# Altium PCB Controller.PcbDoc (part 2 of 2)
Units mm, origin at the board's own origin, x right, y up, seen from the top; angles counter-clockwise.
Board outline 100 x 95 mm, 2 copper layers (Top Layer, Bottom Layer); 164 components, 143 nets, 702 pads, 925 vias.
Unrouted connection lines stored in the file: 248.
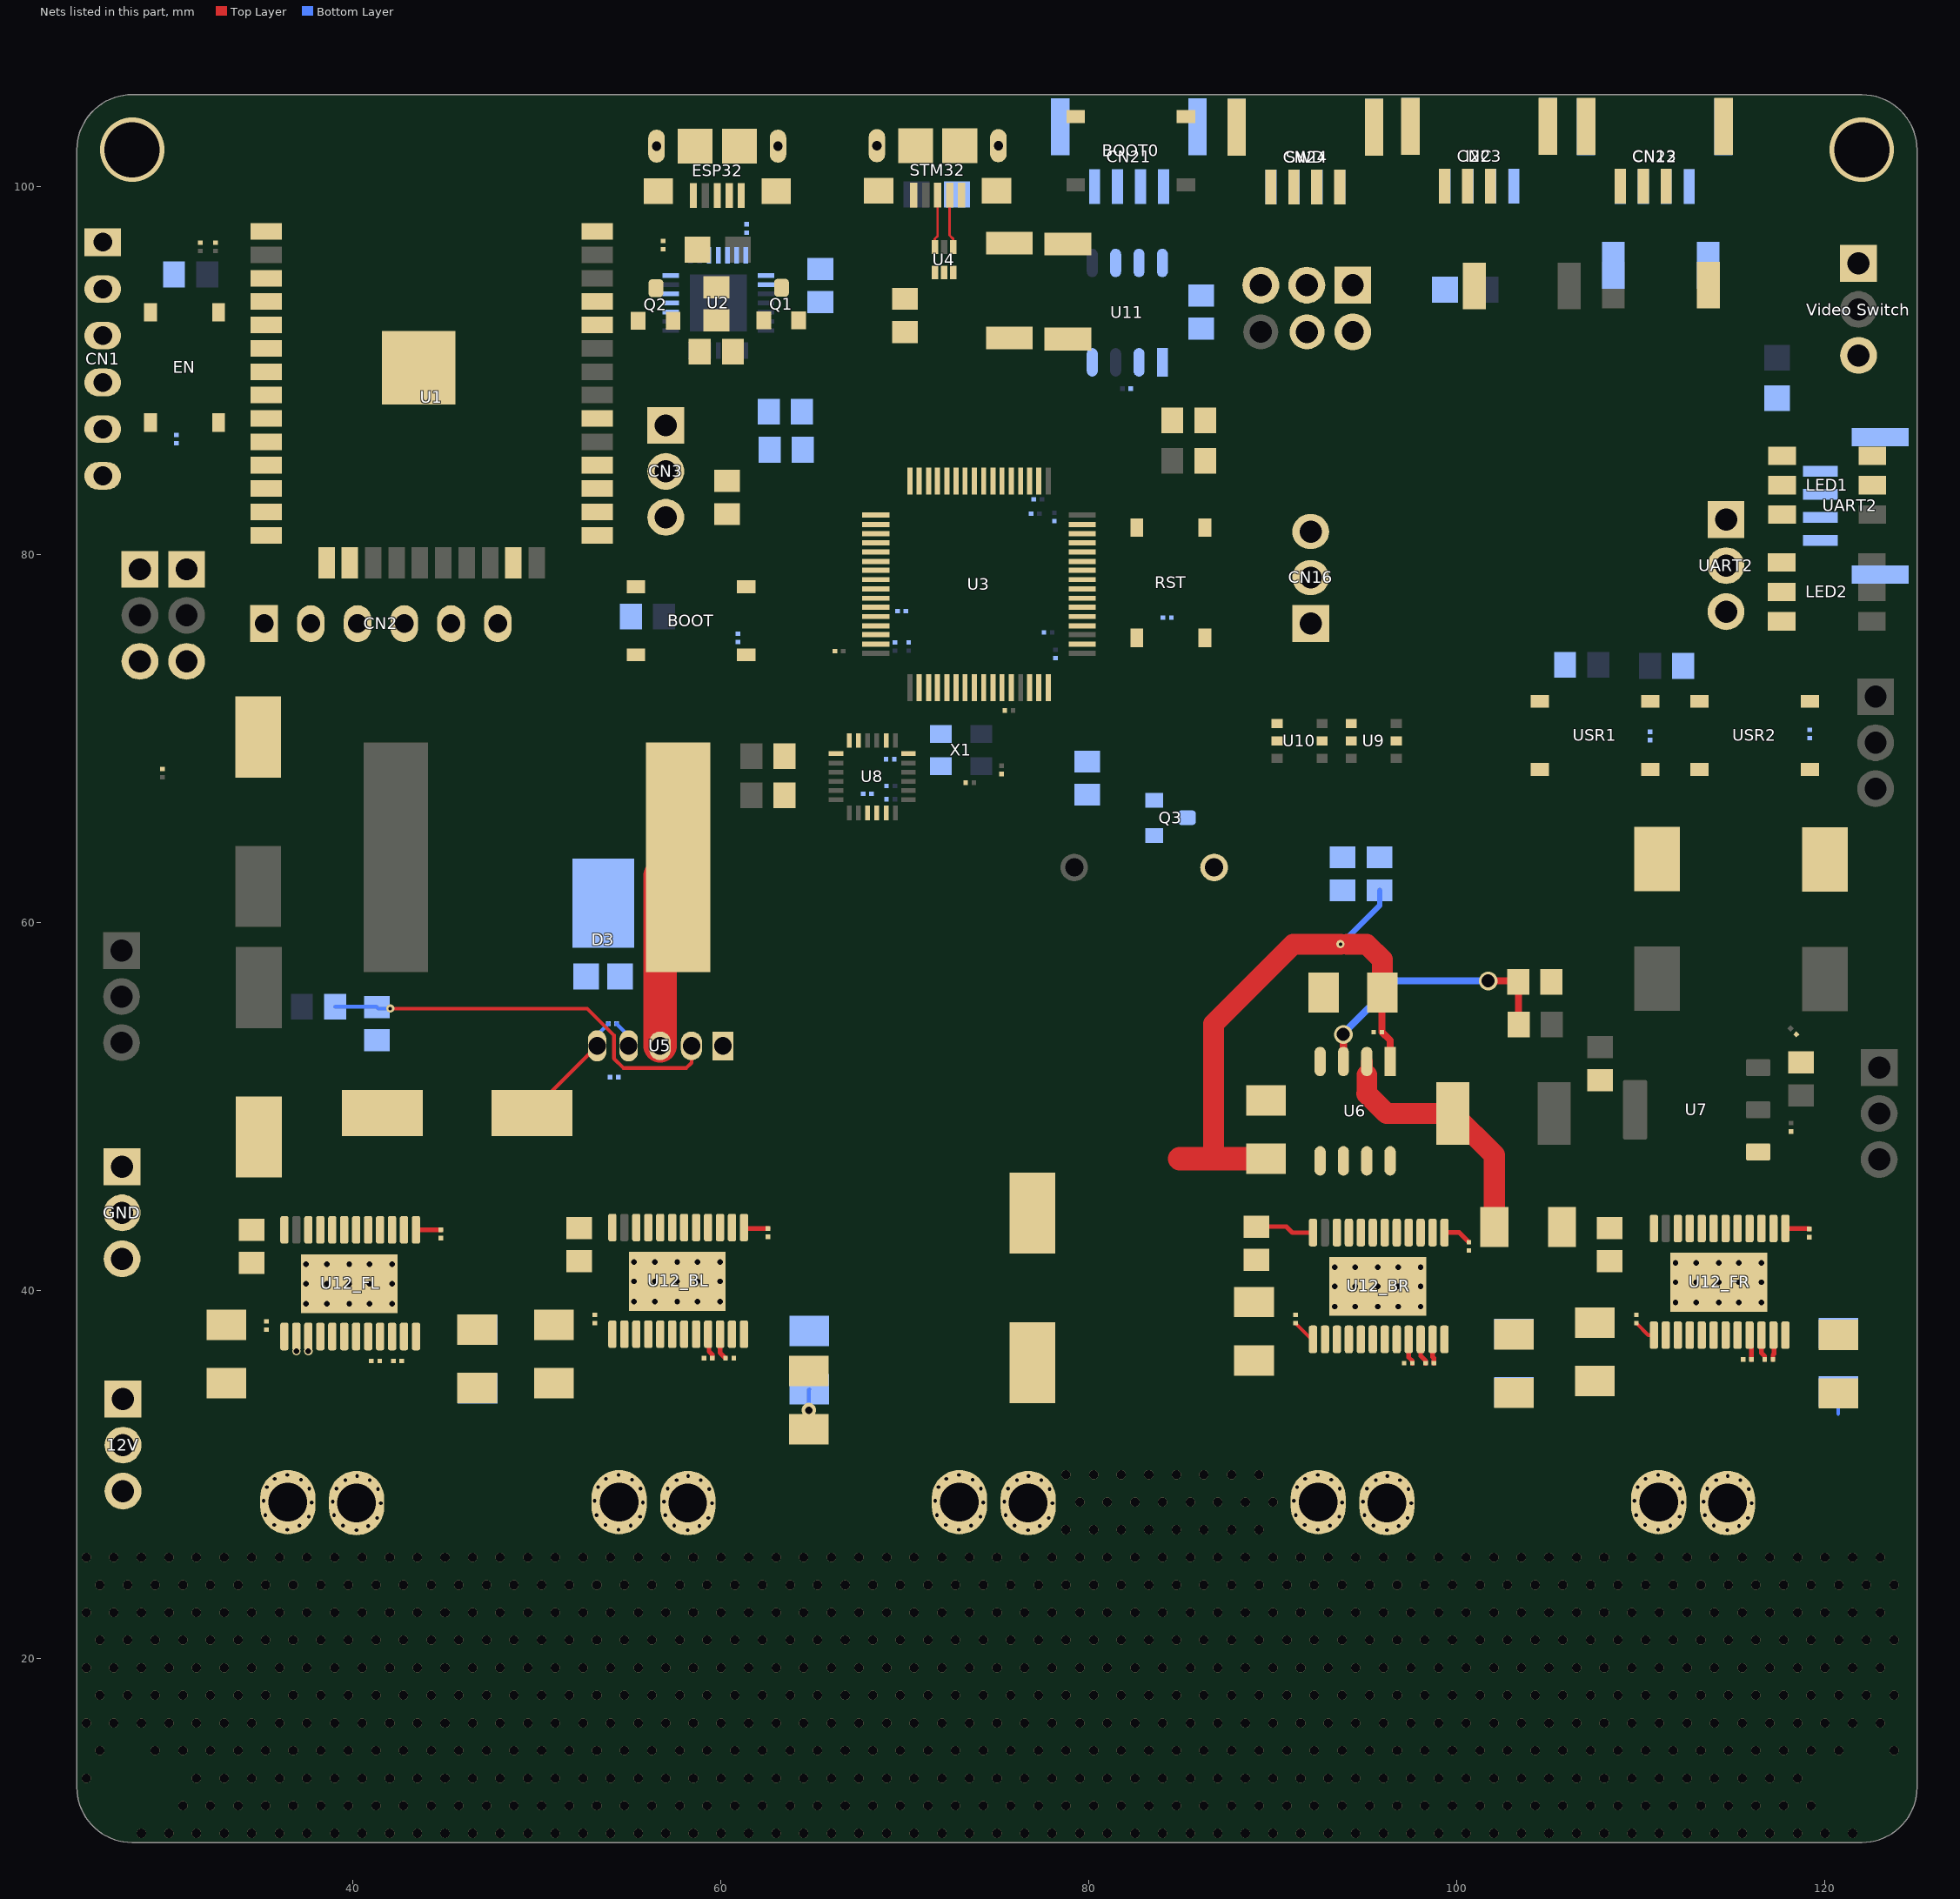
[diagram p2: the nets of this part, all layers, seen from the top]

## Via types
v1: diameter 0.45/0.45 (per signal layer), hole 0.5, Top Layer to Bottom Layer, tented both sides, 733 vias
v2: diameter 0.276, hole 0.2, Top Layer to Bottom Layer, tented both sides, 120 vias
v3: diameter 0.457, hole 0.3, Top Layer to Bottom Layer, tented both sides, 60 vias
v4: diameter 3.5, hole 3, Top Layer to Bottom Layer, 4 vias
v5: diameter 0.45, hole 0.2, Top Layer to Bottom Layer, tented both sides, 3 vias
v6: diameter 0.457, hole 0.305, Top Layer to Bottom Layer, tented both sides, 2 vias
v7: diameter 1.016, hole 0.711, Top Layer to Bottom Layer, tented both sides, 2 vias
v8: diameter 0.8, hole 0.4, Top Layer to Bottom Layer, tented both sides, 1 vias

## Nets (pads, with @x,y where several pads share a name; then routed paths per layer and width w, separated by ;. In a path a pad name is that pad's centre, name@x,y a point inside that pad or via, vN(x,y) a via of type N, cw(c..) or ccw(c..) an arc to the next point about the centre after c; other vN are vias at no path point) (continued)
12V: 12V.1 12V.2 12V.3 "3S INPUT.A" C22.2 C23.2 C24.1 C25.2 C26.2 C27.2 C37.1 C44.2 C46.2 C47.2 C48.2 C49.2 R22.2 U5.5 U6.1 U12_BL.13 U12_BL.20 U12_BR.13 U12_BR.20 U12_FL.13 U12_FL.20 U12_FR.13 U12_FR.20 | length 46.3
  Top Layer w0.2: C49.2@88.975,36.2 C49.2@89.2,36.2 ; C46.2@91.225,38.225 92.1,37.35 U12_BR.13@92.175,37.35 ; C46.2@109.75,38.225 110.4,37.575 U12_FR.13@110.7,37.575
  Top Layer w0.203: C24.1@49.728,49.65 49.728,49.758 U5.5@53.27,53.3 ; C47.2@64.775,32.463 v8(64.775,33.5)
  Top Layer w0.3: v5(93.675,58.825) 94.025,58.825
  Top Layer w0.381: C25.2@88.775,47.162 C25.2@89.625,47.162 ; C26.2@95.937,56.2 95.925,56.188 C27.2@95.925,54.05 96.37,53.605 U6.1@96.37,52.45
  Top Layer w1.143: 86.775,47.162 86.775,54.5 91.1,58.825 v5(93.675,58.825) ; 94.025,58.825 95.1,58.825 95.937,57.988 C26.2@95.937,56.2
  Top Layer w1.27: 84.931,47.162 86.775,47.162 C25.2@88.775,47.162
  Bottom Layer w0.2: 120.725,33.3 C48.2@120.725,34.512
  Bottom Layer w0.203: U5.5@53.27,52.63 U5.5@53.27,53.3 53.27,53.895 C22.2@53.875,54.5 ; v8(64.775,33.5) 64.775,34.613 C48.2@64.8,34.637
  Bottom Layer w0.3: v5(93.675,58.825) 93.675,58.8 95.8,60.925 R22.2@95.8,61.75
  other v1: 28.5,10.5 30,10.5 31.5,10.5 33,10.5 34.5,10.5 36,10.5 37.5,10.5 39,10.5 40.5,10.5 42,10.5 43.5,10.5 45,10.5 46.5,10.5 48,10.5 49.5,10.5 51,10.5 52.5,10.5 54,10.5 55.5,10.5 57,10.5 58.5,10.5 60,10.5 61.5,10.5 63,10.5 64.5,10.5 66,10.5 67.5,10.5 69,10.5 70.5,10.5 72,10.5 73.5,10.5 75,10.5 76.5,10.5 78,10.5 79.5,10.5 81,10.5 82.5,10.5 84,10.5 85.5,10.5 87,10.5 88.5,10.5 90,10.5 91.5,10.5 93,10.5 94.5,10.5 96,10.5 97.5,10.5 99,10.5 100.5,10.5 102,10.5 103.5,10.5 105,10.5 106.5,10.5 108,10.5 109.5,10.5 111,10.5 112.5,10.5 114,10.5 115.5,10.5 117,10.5 118.5,10.5 120,10.5 121.5,10.5 30.75,12 32.25,12 33.75,12 35.25,12 36.75,12 38.25,12 39.75,12 41.25,12 42.75,12 44.25,12 45.75,12 47.25,12 48.75,12 50.25,12 51.75,12 53.25,12 54.75,12 56.25,12 57.75,12 59.25,12 60.75,12 62.25,12 63.75,12 65.25,12 66.75,12 68.25,12 69.75,12 71.25,12 72.75,12 74.25,12 75.75,12 77.25,12 78.75,12 80.25,12 81.75,12 83.25,12 84.75,12 86.25,12 87.75,12 89.25,12 90.75,12 92.25,12 93.75,12 95.25,12 96.75,12 98.25,12 99.75,12 101.25,12 102.75,12 104.25,12 105.75,12 107.25,12 108.75,12 110.25,12 111.75,12 113.25,12 114.75,12 116.25,12 117.75,12 119.25,12 25.5,13.5 31.5,13.5 33,13.5 34.5,13.5 36,13.5 37.5,13.5 39,13.5 40.5,13.5 42,13.5 43.5,13.5 45,13.5 46.5,13.5 48,13.5 49.5,13.5 51,13.5 52.5,13.5 54,13.5 55.5,13.5 57,13.5 58.5,13.5 60,13.5 61.5,13.5 63,13.5 64.5,13.5 66,13.5 67.5,13.5 69,13.5 70.5,13.5 72,13.5 73.5,13.5 75,13.5 76.5,13.5 78,13.5 79.5,13.5 81,13.5 82.5,13.5 84,13.5 85.5,13.5 87,13.5 88.5,13.5 90,13.5 91.5,13.5 93,13.5 94.5,13.5 96,13.5 97.5,13.5 99,13.5 100.5,13.5 102,13.5 103.5,13.5 105,13.5 106.5,13.5 108,13.5 109.5,13.5 111,13.5 112.5,13.5 114,13.5 115.5,13.5 117,13.5 118.5,13.5 26.25,15 29.25,15 30.75,15 32.25,15 33.75,15 35.25,15 36.75,15 38.25,15 39.75,15 41.25,15 42.75,15 44.25,15 45.75,15 47.25,15 48.75,15 50.25,15 51.75,15 53.25,15 54.75,15 56.25,15 57.75,15 59.25,15 60.75,15 62.25,15 63.75,15 65.25,15 66.75,15 68.25,15 69.75,15 71.25,15 72.75,15 74.25,15 75.75,15 77.25,15 78.75,15 80.25,15 81.75,15 83.25,15 84.75,15 86.25,15 87.75,15 89.25,15 90.75,15 92.25,15 93.75,15 95.25,15 96.75,15 98.25,15 99.75,15 101.25,15 102.75,15 104.25,15 105.75,15 107.25,15 108.75,15 110.25,15 111.75,15 113.25,15 114.75,15 116.25,15 117.75,15 119.25,15 120.75,15 123.75,15 25.5,16.5 27,16.5 28.5,16.5 30,16.5 31.5,16.5 33,16.5 34.5,16.5 36,16.5 37.5,16.5 39,16.5 40.5,16.5 42,16.5 43.5,16.5 45,16.5 46.5,16.5 48,16.5 49.5,16.5 51,16.5 52.5,16.5 54,16.5 55.5,16.5 57,16.5 58.5,16.5 60,16.5 61.5,16.5 63,16.5 64.5,16.5 66,16.5 67.5,16.5 69,16.5 70.5,16.5 72,16.5 73.5,16.5 75,16.5 76.5,16.5 78,16.5 79.5,16.5 81,16.5 82.5,16.5 84,16.5 85.5,16.5 87,16.5 88.5,16.5 90,16.5 91.5,16.5 93,16.5 94.5,16.5 96,16.5 97.5,16.5 99,16.5 100.5,16.5 102,16.5 103.5,16.5 105,16.5 106.5,16.5 108,16.5 109.5,16.5 111,16.5 112.5,16.5 114,16.5 115.5,16.5 117,16.5 118.5,16.5 120,16.5 121.5,16.5 123,16.5 26.25,18 27.75,18 29.25,18 30.75,18 32.25,18 33.75,18 35.25,18 36.75,18 38.25,18 39.75,18 41.25,18 42.75,18 44.25,18 45.75,18 47.25,18 48.75,18 50.25,18 51.75,18 53.25,18 54.75,18 56.25,18 57.75,18 59.25,18 60.75,18 62.25,18 63.75,18 65.25,18 66.75,18 68.25,18 69.75,18 71.25,18 72.75,18 74.25,18 75.75,18 77.25,18 78.75,18 80.25,18 81.75,18 83.25,18 84.75,18 86.25,18 87.75,18 89.25,18 90.75,18 92.25,18 93.75,18 95.25,18 96.75,18 98.25,18 99.75,18 101.25,18 102.75,18 104.25,18 105.75,18 107.25,18 108.75,18 110.25,18 111.75,18 113.25,18 114.75,18 116.25,18 117.75,18 119.25,18 120.75,18 122.25,18 123.75,18 25.5,19.5 27,19.5 28.5,19.5 30,19.5 31.5,19.5 33,19.5 34.5,19.5 36,19.5 37.5,19.5 39,19.5 40.5,19.5 42,19.5 43.5,19.5 45,19.5 46.5,19.5 48,19.5 49.5,19.5 51,19.5 52.5,19.5 54,19.5 55.5,19.5 57,19.5 58.5,19.5 60,19.5 61.5,19.5 63,19.5 64.5,19.5 66,19.5 67.5,19.5 69,19.5 70.5,19.5 72,19.5 73.5,19.5 75,19.5 76.5,19.5 78,19.5 79.5,19.5 81,19.5 82.5,19.5 84,19.5 85.5,19.5 87,19.5 88.5,19.5 90,19.5 91.5,19.5 93,19.5 94.5,19.5 96,19.5 97.5,19.5 99,19.5 100.5,19.5 102,19.5 103.5,19.5 105,19.5 106.5,19.5 108,19.5 109.5,19.5 111,19.5 112.5,19.5 114,19.5 115.5,19.5 117,19.5 118.5,19.5 120,19.5 121.5,19.5 123,19.5 26.25,21 27.75,21 29.25,21 30.75,21 32.25,21 33.75,21 35.25,21 36.75,21 38.25,21 39.75,21 41.25,21 42.75,21 44.25,21 45.75,21 47.25,21 48.75,21 50.25,21 51.75,21 53.25,21 54.75,21 56.25,21 57.75,21 59.25,21 60.75,21 62.25,21 63.75,21 65.25,21 66.75,21 68.25,21 69.75,21 71.25,21 72.75,21 74.25,21 75.75,21 77.25,21 78.75,21 80.25,21 81.75,21 83.25,21 84.75,21 86.25,21 87.75,21 89.25,21 90.75,21 92.25,21 93.75,21 95.25,21 96.75,21 98.25,21 99.75,21 101.25,21 102.75,21 104.25,21 105.75,21 107.25,21 108.75,21 110.25,21 111.75,21 113.25,21 114.75,21 116.25,21 117.75,21 119.25,21 120.75,21 122.25,21 123.75,21 25.5,22.5 27,22.5 28.5,22.5 30,22.5 31.5,22.5 33,22.5 34.5,22.5 36,22.5 37.5,22.5 39,22.5 40.5,22.5 42,22.5 43.5,22.5 45,22.5 46.5,22.5 48,22.5 49.5,22.5 51,22.5 52.5,22.5 54,22.5 55.5,22.5 57,22.5 58.5,22.5 60,22.5 61.5,22.5 63,22.5 64.5,22.5 66,22.5 67.5,22.5 69,22.5 70.5,22.5 72,22.5 73.5,22.5 75,22.5 76.5,22.5 78,22.5 79.5,22.5 81,22.5 82.5,22.5 84,22.5 85.5,22.5 87,22.5 88.5,22.5 90,22.5 91.5,22.5 93,22.5 94.5,22.5 96,22.5 97.5,22.5 99,22.5 100.5,22.5 102,22.5 103.5,22.5 105,22.5 106.5,22.5 108,22.5 109.5,22.5 111,22.5 112.5,22.5 114,22.5 115.5,22.5 117,22.5 118.5,22.5 120,22.5 121.5,22.5 123,22.5 26.25,24 27.75,24 29.25,24 30.75,24 32.25,24 33.75,24 35.25,24 36.75,24 38.25,24 39.75,24 41.25,24 42.75,24 44.25,24 45.75,24 47.25,24 48.75,24 50.25,24 51.75,24 53.25,24 54.75,24 56.25,24 57.75,24 59.25,24 60.75,24 62.25,24 63.75,24 65.25,24 66.75,24 68.25,24 69.75,24 71.25,24 72.75,24 74.25,24 75.75,24 77.25,24 78.75,24 80.25,24 81.75,24 83.25,24 84.75,24 86.25,24 87.75,24 89.25,24 90.75,24 92.25,24 93.75,24 95.25,24 96.75,24 98.25,24 99.75,24 101.25,24 102.75,24 104.25,24 105.75,24 107.25,24 108.75,24 110.25,24 111.75,24 113.25,24 114.75,24 116.25,24 117.75,24 119.25,24 120.75,24 122.25,24 123.75,24 25.5,25.5 27,25.5 28.5,25.5 30,25.5 31.5,25.5 33,25.5 34.5,25.5 36,25.5 37.5,25.5 39,25.5 40.5,25.5 42,25.5 43.5,25.5 45,25.5 46.5,25.5 48,25.5 49.5,25.5 51,25.5 52.5,25.5 54,25.5 55.5,25.5 57,25.5 58.5,25.5 60,25.5 61.5,25.5 63,25.5 64.5,25.5 66,25.5 67.5,25.5 69,25.5 70.5,25.5 72,25.5 73.5,25.5 75,25.5 76.5,25.5 78,25.5 79.5,25.5 81,25.5 82.5,25.5 84,25.5 85.5,25.5 87,25.5 88.5,25.5 90,25.5 91.5,25.5 93,25.5 94.5,25.5 96,25.5 97.5,25.5 99,25.5 100.5,25.5 102,25.5 103.5,25.5 105,25.5 106.5,25.5 108,25.5 109.5,25.5 111,25.5 112.5,25.5 114,25.5 115.5,25.5 117,25.5 118.5,25.5 120,25.5 121.5,25.5 123,25.5 78.75,27 80.25,27 81.75,27 83.25,27 84.75,27 86.25,27 87.75,27 89.25,27 79.5,28.5 81,28.5 82.5,28.5 84,28.5 85.5,28.5 87,28.5 88.5,28.5 90,28.5 78.75,30 80.25,30 81.75,30 83.25,30 84.75,30 86.25,30 87.75,30 89.25,30
  other v2: 76.694,26.976 77.329,27.205 75.957,27.23 77.811,27.636 75.475,27.789 78.015,28.449 75.398,28.525 77.862,29.211 75.602,29.237 76.084,29.694 77.405,29.694 76.719,29.922
BOOT0: BOOT0.4 C18.1 U3.60
DRV_nEN: U3.20 U12_BL.9 U12_BR.9 U12_FL.9 U12_FR.9
ESP_BOOT: BOOT.2 C6.2 Q2.2 U1.25
ESP_EN: C5.2 EN.2 Q1.3 U1.3
ESP_IN_INTERRUPT: R5.2 U3.50
ESP_OUT_INTERRUPT: R8.2 U3.53
ESP_RX: CN3.1 U1.28 U3.52
ESP_RX0: U1.34 U2.26
ESP_TX: CN3.2 U1.27 U3.51
ESP_TX0: U1.35 U2.25
ESP_USB_N: ESP32.2 U2.5
ESP_USB_P: ESP32.3 U2.4
EX_I2C_SCL: CN13.2 I2C.2 R21.1 U3.42
EX_I2C_SDA: CN13.3 I2C.3 R20.1 U3.43
GND: "3S INPUT.K" "Video Switch.3" BOOT.3 C1.1 C2.1 C3.1 C4.1 C7.1 C8.1 C9.1 C10.1 C11.1 C12.1 C13.1 C14.1 C15.1 C16.1 C17.1 C18.2 C23.1 C24.2 C25.1 C26.1 C27.1 C28.1 C29.2 C30.2 C31.2 C32.2 C33.1 C34.1 C35.1 C36.1 C37.2 C38.1 C39.1 C40.1 C41.1 C42.1 C43.2 C46.1 C47.1 C48.1 C49.1 CN3.3 CN13.4 CN13.5 CN16.3 CN21.4 CN21.5 CN22.4 CN22.5 CN23.4 CN23.5 CN24.4 CN24.5 D3.1 D3.2 D4.A EN.3 ESP32.5 ESP32.S GND.1 GND.2 GND.3 I2C.4 I2C.5 LED1.3 LED2.3 pad.1@94.34,92.105 pad.3@28.421,74.197 pad.3@30.961,74.197 Q3.2 R9.1 R13.1 R16.2 R19.1 R23.2 R28.1 R29.1 RST.3 STM32.5 STM32.S SWD.4 SWD.5 U1.1 U1.15 U1.38 U2.3 U3.12 U3.31 U3.63 U4.2 U5.1 U6.4 U6.5 U6.6 U6.7 U6.8 U7.1 U8.1 U8.9 U8.11 U8.18 U9.2 U10.2 U11.2 U12_BL.16 U12_BL.17 U12_BL.24 U12_BL.THERM U12_BR.16 U12_BR.17 U12_BR.24 U12_BR.THERM U12_FL.16 U12_FL.17 U12_FL.24 U12_FL.THERM U12_FR.16 U12_FR.17 U12_FR.24 U12_FR.THERM UART2.3@114.625,76.9 UART2.4 UART2.5 USR1.3 USR2.3 X1.2 | length 2.8
  Top Layer w0.254: R29.1@34.5,41.5 R29.1@34.575,41.425
  Top Layer w0.45: v3(39.8,40.375) v3(40.9,40.375) v3(42.125,40.375)
  Top Layer w1: U12_FL.THERM@39.675,40.375 v3(39.8,40.375) ; U12_BL.THERM@57.5,40.5 v3(57.625,40.5) ; U12_BR.THERM@95.575,40.225 v3(95.7,40.225)
  other v2: 72.935,27.001 73.595,27.23 72.223,27.255 74.103,27.713 71.741,27.789 74.255,28.475 71.639,28.576 74.128,29.237 71.817,29.313 73.671,29.719 72.249,29.77 72.935,29.973
  other v3: 93.35,39.125 94.475,39.125 95.7,39.125 96.8,39.125 98.025,39.125 37.45,39.275 38.575,39.275 39.8,39.275 40.9,39.275 42.125,39.275 111.875,39.35 113,39.35 114.225,39.35 115.325,39.35 116.55,39.35 55.275,39.4 56.4,39.4 57.625,39.4 58.725,39.4 59.95,39.4 93.35,40.225 94.475,40.225 96.8,40.225 98.025,40.225 37.45,40.375 38.575,40.375 111.875,40.45 113,40.45 114.225,40.45 115.325,40.45 116.55,40.45 55.275,40.5 56.4,40.5 58.725,40.5 59.95,40.5 93.35,41.275 94.475,41.275 95.7,41.275 96.8,41.275 98.025,41.275 37.45,41.425 38.575,41.425 39.8,41.425 40.9,41.425 42.125,41.425 111.875,41.5 113,41.5 114.225,41.5 115.325,41.5 116.55,41.5 55.275,41.55 56.4,41.55 57.625,41.55 58.725,41.55 59.95,41.55
  other v4: 28,102 122,102
IN_I2C_SCL: R25.1 U3.58 U8.23
IN_I2C_SDA: R24.1 U3.59 U8.24
NetC3_2: C3.2 U2.6
NetC5_1: C5.1 EN.4
NetC6_1: BOOT.4 C6.1
NetC19_1: C19.1 RST.4
NetC20_1: C20.1 USR2.4
NetC21_1: C21.1 USR1.4
NetC22_1: C22.1 U5.4 | length 1.5
  Bottom Layer w0.203: C22.1@54.325,54.5 54.98,53.845 U5.4@54.98,53.3
NetC40_2: C40.2 U8.20
NetC41_2: C41.2 U8.10
NetC43_BL_1: C43.1@62.55,43.375 U12_BL.1 | length 1.3
  Top Layer w0.254: U12_BL.1@61.25,43.425 61.3,43.375 C43.1@62.55,43.375
NetC43_BR_1: C43.1@100.65,42.625 U12_BR.1 | length 1.5
  Top Layer w0.254: U12_BR.1@99.325,43.15 100.125,43.15 C43.1@100.65,42.625
NetC43_FL_1: C43.1@44.775,43.3 U12_FL.1 | length 1.3
  Top Layer w0.254: U12_FL.1@43.425,43.3 C43.1@44.775,43.3
NetC43_FR_1: C43.1@119.15,43.35 U12_FR.1 | length 1.3
  Top Layer w0.254: U12_FR.1@117.85,43.375 119.125,43.375 C43.1@119.15,43.35
NetC44_BL_1: C44.1@59.525,36.325 U12_BL.21 | length 2
  Top Layer w0.254: U12_BL.21@59.3,37 U12_BL.21@59.3,37.625 59.35,37.575 59.35,36.7 59.525,36.525 C44.1@59.525,36.325
NetC44_BR_1: C44.1@97.575,36.05 U12_BR.21 | length 1.4
  Top Layer w0.254: U12_BR.21@97.375,37.35 97.375,36.375 97.575,36.175 C44.1@97.575,36.05
NetC44_FL_1: C44.1@41.45,36.175 U12_FL.21
NetC44_FR_1: C44.1@116,36.25 U12_FR.21 | length 1.4
  Top Layer w0.254: U12_FR.21@115.9,37.575 116,37.475 C44.1@116,36.25
NetC45_BL_1: C45.1@60.7,36.325 U12_BL.23 | length 0.1
  Top Layer w0.254: U12_BL.23@60.6,37.625 U12_BL.23@60.7,37.525
NetC45_BL_2: C45.2@60.25,36.325 U12_BL.22 | length 1.4
  Top Layer w0.254: U12_BL.22@59.95,37.625 59.95,36.625 C45.2@60.25,36.325
NetC45_BR_1: C45.1@98.75,36.05 U12_BR.23 | length 1.3
  Top Layer w0.254: U12_BR.23@98.675,37.35 98.675,36.4 98.75,36.325 C45.1@98.75,36.05
NetC45_BR_2: C45.2@98.3,36.05 U12_BR.22 | length 1.4
  Top Layer w0.254: U12_BR.22@98.025,37.35 98.025,36.45 98.3,36.175 C45.2@98.3,36.05
NetC45_FL_1: C45.1@42.65,36.175 U12_FL.23
NetC45_FL_2: C45.2@42.2,36.175 U12_FL.22
NetC45_FR_1: C45.1@117.175,36.25 U12_FR.23 | length 1.4
  Top Layer w0.254: C45.1@117.175,36.25 117.175,36.5 117.225,36.55 117.225,37.55 U12_FR.23@117.2,37.575
NetC45_FR_2: C45.2@116.725,36.25 U12_FR.22 | length 1.4
  Top Layer w0.254: U12_FR.22@116.55,37.575 116.55,36.6 116.725,36.425 C45.2@116.725,36.25
NetCN1_1: CN1.1 U1.4
NetCN1_2: CN1.2 U1.5
NetCN1_3: CN1.3 U1.6
NetCN1_4: CN1.4 U1.7
NetCN1_5: CN1.5 U1.8
NetCN1_6: CN1.6 U1.9
NetCN2_1: CN2.1 U1.10
NetCN2_2: CN2.2 U1.11
NetCN2_3: CN2.3 U1.12
NetCN2_4: CN2.4 U1.13
NetCN2_5: CN2.5 U1.14
NetCN2_6: CN2.6 U1.16
NetCN14_1: CN16.1 pad.1@28.421,79.197 pad.1@30.961,79.197 U3.24
NetCN16_2: CN16.2 U3.25
NetCN18_1: "Video Switch.1" U3.34
NetCN19_1: D5.K UART2.1@119.75,84.525
NetCN19_2: U3.56 UART2.1@114.625,81.9 UART2.2@119.75,83.275
NetCN21_1: CN21.1 CN22.1 CN23.1 CN24.1 D6.K
NetCN21_2: CN21.2 CN22.2 CN23.2 CN24.2 R27.2 U11.7
NetCN21_3: CN21.3 CN22.3 CN23.3 CN24.3 R27.1 U11.6
NetCN25_A: FL_MOT.A U12_FL.18 U12_FL.19
  other v2: 40.194,26.976 40.829,27.205 39.457,27.23 41.311,27.636 38.975,27.789 41.515,28.449 38.898,28.525 41.362,29.211 39.102,29.237 39.584,29.694 40.905,29.694 40.219,29.922
NetCN25_K: FL_MOT.K U12_FL.14 U12_FL.15
  other v2: 36.435,27.001 37.095,27.23 35.723,27.255 37.603,27.713 35.241,27.789 37.755,28.475 35.139,28.576 37.628,29.237 35.317,29.313 37.171,29.719 35.749,29.77 36.435,29.973
  other v6: 36.925,36.7 37.575,36.7
NetCN26_A: FR_MOT.A U12_FR.18 U12_FR.19
  other v2: 114.694,26.976 115.329,27.205 113.957,27.23 115.811,27.636 113.475,27.789 116.015,28.449 113.398,28.525 115.862,29.211 113.602,29.237 114.084,29.694 115.405,29.694 114.719,29.922
NetCN26_K: FR_MOT.K U12_FR.14 U12_FR.15
  other v2: 110.935,27.001 111.595,27.23 110.223,27.255 112.103,27.713 109.741,27.789 112.255,28.475 109.639,28.576 112.128,29.237 109.817,29.313 111.671,29.719 110.249,29.77 110.935,29.973
NetCN27_A: BL_MOT.A U12_BL.18 U12_BL.19
  other v2: 58.194,26.976 58.829,27.205 57.457,27.23 59.311,27.636 56.975,27.789 59.515,28.449 56.898,28.525 59.362,29.211 57.102,29.237 57.584,29.694 58.905,29.694 58.219,29.922
NetCN27_K: BL_MOT.K U12_BL.14 U12_BL.15
  other v2: 54.435,27.001 55.095,27.23 53.723,27.255 55.603,27.713 53.241,27.789 55.755,28.475 53.139,28.576 55.628,29.237 53.317,29.313 55.171,29.719 53.749,29.77 54.435,29.973
NetCN28_A: BR_MOT.A U12_BR.18 U12_BR.19
  other v2: 96.194,26.976 96.829,27.205 95.457,27.23 97.311,27.636 94.975,27.789 97.515,28.449 94.898,28.525 97.362,29.211 95.102,29.237 95.584,29.694 96.905,29.694 96.219,29.922
NetCN28_K: BR_MOT.K U12_BR.14 U12_BR.15
  other v2: 92.435,27.001 93.095,27.23 91.723,27.255 93.603,27.713 91.241,27.789 93.755,28.475 91.139,28.576 93.628,29.237 91.317,29.313 93.171,29.719 91.749,29.77 92.435,29.973
NetD3_3: D3.3 L1.1 U5.3 | length 10.7
  Top Layer w1.8: U5.3@56.69,53.3 56.69,62.565 L1.1@57.675,63.55
NetD4_K: D4.K L2.1 U6.2 | length 14
  Top Layer w0.635: U6.2@95.1,51.725 U6.2@95.1,52.45
  Top Layer w1.1: 95.1,50.7 U6.2@95.1,51.725
  Top Layer w1.143: 95.1,50.7 96.175,49.625 L2.1@99.775,49.625 102.036,47.365 D4.K@102.036,43.45
NetLED1_1: LED1.1 U9.5
NetLED1_2: LED1.2 U10.5
NetLED1_5: LED1.5 LED2.2
NetLED1_6: LED1.6 LED2.1
NetLS1_K: LS1.K Q3.3
NetQ1_1: Q1.1 R4.2
NetQ1_2: Q1.2 R7.1 U2.24
NetQ2_1: Q2.1 R7.2
NetQ2_3: Q2.3 R4.1 U2.28
NetQ3_1: Q3.1 R26.1
NetR1_2: R1.2 U2.9
NetR2_2: EN.1 R2.2
NetR3_1: R3.1 U1.30
NetR5_1: R5.1 U1.26
NetR6_2: BOOT.1 R6.2
NetR8_1: R8.1 U1.23
NetR9_2: BOOT0.3 R9.2
NetR10_1: R10.1 U3.47
NetR11_2: R11.2 RST.1
NetR14_2: R14.2 USR2.1
NetR15_2: R15.2 USR1.1
NetR16_1: R16.1 R17.1 U6.3 | length 14.6
  Top Layer w0.381: v7(93.825,53.925) 93.825,53.725 93.83,53.72 U6.3@93.83,52.45 ; v7(101.7,56.825) 103.275,56.825 R16.1@103.325,56.775 103.35,56.75 R17.1@103.35,54.45
  Bottom Layer w0.381: v7(93.825,53.925) 93.8,53.95 96.675,56.825 v7(101.7,56.825)
NetR18_1: R18.1 R19.2 U5.2 | length 22.5
  Top Layer w0.203: v5(42.025,55.325) 52.729,55.325 54.178,53.875 54.178,52.618 54.696,52.1 58.125,52.1 58.4,52.375 U5.2@58.4,53.3
  Bottom Layer w0.203: R18.1@39.025,55.425 41.275,55.425 R19.2@41.3,55.4 41.375,55.325 v5(42.025,55.325)
NetR22_1: R22.1 R23.1 U3.28
NetR26_2: R26.2 U3.54
NetR28_2: R28.2 U11.8
NetR29_BL_2: R29.2@52.3,43.4 U3.26 U12_BL.10 U12_BL.12 | length 0
  Top Layer w0.089: U12_BL.12@54.05,43.425 U12_BL.12@54.075,43.4
NetR29_BR_2: R29.2@89.1,43.475 U3.29 U12_BR.10 U12_BR.12 | length 3.2
  Top Layer w0.254: R29.2@89.1,43.475 90.725,43.475 91.054,43.146 92.171,43.146 U12_BR.12@92.175,43.15
NetR29_FL_2: R29.2@34.5,43.3 U3.27 U12_FL.10 U12_FL.12
NetR29_FR_2: R29.2@108.3,43.4 U3.30 U12_FR.10 U12_FR.12 | length 0
  Top Layer w0.254: U12_FR.12@110.675,43.4 U12_FR.12@110.7,43.375
NetU3_2: U3.2 U12_BR.6
NetU3_3: U3.3 U12_FR.6
NetU3_4: U3.4 U12_BL.6
NetU3_6: U3.6 U12_FL.6
NetU3_8: U3.8 U12_FL.2
NetU3_9: U3.9 U12_BL.2
NetU3_10: U3.10 U12_FR.2
NetU3_11: U3.11 U12_BR.2
NetU3_14: U3.14 U12_FL.7
NetU3_15: U3.15 U12_FL.8
NetU3_16: U3.16 U12_BL.7
NetU3_18: U3.18 U12_BL.8
NetU3_23: U3.23 U12_FR.8
NetU3_35: U3.35 U9.1
NetU3_36: U3.36 U10.1
NetU3_37: U3.37 U12_FR.7
NetU3_39: U3.39 U12_BR.7
NetU3_40: U3.40 U12_BR.8
NetU3_61: U3.61 U11.4
NetU3_62: U3.62 U11.1
NO_ESD_N: STM32.2 U4.4 | length 2.9
  Top Layer w0.127: STM32.2@72.425,99.55 72.425,97.353 72.625,97.153 U4.4@72.625,96.715
NO_ESD_P: STM32.3 U4.6 | length 2.9
  Top Layer w0.13: U4.6@71.625,96.715 71.625,97.155 71.775,97.305 STM32.3@71.775,99.55
nRST: C19.2 pad.2@91.85,92.1 R3.2 RST.2 U3.7
RCC_OSC_IN: U3.5 X1.3
SPI_MISO: U3.22 U12_BL.3 U12_BR.3 U12_FL.3 U12_FR.3
SPI_MOSI: U3.57 U12_BL.4 U12_BR.4 U12_FL.4 U12_FR.4 | length 0
  Top Layer w0.089: U12_FR.4@115.9,43.375 U12_FR.4@115.925,43.4
SPI_SCLK: U3.21 U12_BL.5 U12_BR.5 U12_FL.5 U12_FR.5 | length 0
  Top Layer w0.089: U12_FR.5@115.225,43.4 U12_FR.5@115.25,43.375
SWCLK: pad.3@89.34,94.645 SWD.2 U3.49
SWDIO: pad.2@91.84,94.645 SWD.3 U3.46
SWO: pad.1@94.34,94.645 SWD.1 U3.55 UART2.2@114.625,79.4 UART2.3@119.75,82.025
USB_DETECT: R12.1 R13.2 U3.48
USB_N: U3.44 U4.3
USB_P: R10.2 U3.45 U4.1
USR_BTN1: C21.2 U3.38 USR1.2
USR_BTN2: C20.2 U3.41 USR2.2
VBUS_ESP: C4.2 D1.A ESP32.1 R1.1 U2.7 U2.8
VBUS_STM: D2.A R12.2 STM32.1
pads on no net: BOOT0.2 ESP32.4 LED2.5 LED2.6 STM32.4 U1.17 U1.18 U1.19 U1.20 U1.21 U1.22 U1.24 U1.29 U1.31 U1.32 U1.33 U1.36 U1.37 U2.1 U2.2 U2.10 U2.11 U2.12 U2.13 U2.14 U2.15 U2.16 U2.17 U2.18 U2.19 U2.20 U2.21 U2.22 U2.23 U2.27 U2.29 U7.4 U8.2 U8.3 U8.4 U8.5 U8.6 U8.7 U8.12 U8.14 U8.15 U8.16 U8.17 U8.19 U8.21 U8.22 U11.5
copper on no net:
  other v4: 28,13 122,13

## Polygon pours and split planes (outlines as drawn)
GND on Bottom Layer "NONET_L02_P012" (solid, shelved, pour order 12): 25,105 25,26.275 125,26.275 125,105
12V on Bottom Layer "12V_L02_P010" (solid, pour order 10): 25,26.275 25,10 125,10 125,26.275 90.525,26.275 90.525,30.475 74.875,30.475 74.875,30.125 74.875,26.275
12V on Bottom Layer "12V_L02_P002" (solid, pour order 2): 25.2,37.3
12V on Top Layer "12V_L01_P018" (solid, pour order 18): 25,38.1 25,10 125,10 124.796,10.204 124.796,37.9 74.7,37.9 74.7,26.475 70.725,26.475 63.171,34.029 63.171,38.1
GND on Top Layer "NONET_L01_P020" (solid, shelved, pour order 20): 25,105 125,105 125,37.9 74.7,37.9 74.7,26.475 70.725,26.475 63.171,34.029 63.171,38.1 25.205,38.1
12V on Top Layer "12V_L01_P008" (solid, pour order 8): 26,26

## Other copper
Top Layer:
  region: 78.425,26.45 78.4,26.475 74.9,26.475
  region net NetCN25_A: 39.3,38.175 39.3,36.725 38.45,35.875 38.45,26.45 41.375,26.45 41.9,26.975 41.9,31.475 40.4,32.975 40.4,38.175
  pour cut-out: 51,107
  pour cut-out: 34.75,105.075 34.75,98.075 53.75,98.075 53.75,105.075
  region net 5V: 105.75,53.8 106.55,53.8 106.55,49 105.75,49
  region net 5V: 109.625,55.45 112.1,55.45 112.75,54.8 108.975,54.8
  region net 8V4: 26.15,59.75 26.15,52.2 28.7,52.2 28.7,59.75
  region net NetCN26_K: 111.125,38.275 111.125,33.9 109.25,32.025 109.25,27.125 109.925,26.45 112.7,26.45 112.7,36.325 112.225,36.8 112.225,38.275
  region net NetCN26_A: 113.725,38.25 113.725,36.8 112.925,36 112.925,26.45 115.9,26.45 116.425,26.975 116.425,32.15 114.825,33.75 114.825,38.25
  region: 92.4,36.6
  region net NetCN28_K: 93.7,38.025 92.6,38.025 92.6,33.8 90.725,31.925 90.725,27.15 91.425,26.45 94.2,26.45 94.2,36.075 93.7,36.575
  region net NetCN28_A: 95.2,38.025 95.2,36.575 94.45,35.825 94.45,26.475 97.425,26.475 97.925,26.975 97.925,32.35 96.3,33.975 96.3,38.025
  region: 78.425,26.45
  region net NetC45_BL_1: 60.825,36.2 60.6,36.2 60.6,36.65 60.375,36.875 60.375,37.075 60.825,37.075
  region net NetCN27_K: 55.625,38.3 54.525,38.3 54.525,33.45 52.75,31.675 52.75,27.15 53.475,26.425 56.2,26.425 56.2,36.225 55.625,36.8
  region: 55.825,37.025
  region net NetCN27_A: 57.125,38.3 57.125,36.825 56.4,36.1 56.4,26.475 59.4,26.475 59.9,26.975 59.9,31.85 58.225,33.525 58.225,38.3
  region: 45.775,40.325
  region net NetC45_FL_1: 42.55,38.25 42.55,36.35 42.525,36.325 42.525,36.05 42.775,36.05 42.775,36.325 43,36.55 43,38.25
  region net NetC45_FL_2: 41.9,38.25 41.9,36.75 42.075,36.575 42.075,36.05 42.325,36.05 42.325,36.4 42.35,36.425 42.35,38.25
  region net NetC44_FL_1: 41.25,36.975 41.25,36.75 41.325,36.675 41.325,36.05 41.6,36.05 41.6,36.675 41.7,36.775 41.7,36.975
  region net NetCN25_K: 37.8,38.2 36.7,38.2 36.7,33.675 34.725,31.7 34.725,27.125 35.375,26.475 38.225,26.475 38.225,36.3 37.8,36.725
  region net GND: 36.2,34.875
Bottom Layer:
  region net NetCN26_A: 114.825,38.25 114.825,33.75 116.425,32.15 116.425,27 115.9,26.475 112.925,26.475 112.925,36 113.725,36.8 113.725,38.25
  region net NetCN27_K: 113.725,38.25
  region net NetCN26_K: 111.125,38.275 111.125,33.9 109.25,32.025 109.25,27.15 109.925,26.475 112.7,26.475 112.7,36.325 112.225,36.8 112.225,38.275
  region net NetCN27_K: 112.225,38.275
  region net NetCN28_A: 96.3,38.025 96.3,33.975 97.925,32.35 97.925,26.975 97.425,26.475 94.45,26.475 94.45,35.825 95.2,36.575 95.2,38.025
  region net NetCN28_K: 92.6,38.025 92.6,33.8 90.725,31.925 90.725,27.175 91.425,26.475 94.2,26.475 94.2,36.075 93.7,36.575 93.7,38.025
  region net NetCN27_A: 57.125,38.3 58.225,38.3 58.225,33.525 59.9,31.85 59.9,26.95 59.425,26.475 56.4,26.475 56.4,36.1 57.125,36.825
  region net NetCN27_K: 54.525,38.3 54.525,33.45 52.75,31.675 52.75,27.15 53.425,26.475 56.2,26.475 56.2,36.225 55.625,36.8 55.625,38.3
  region net NetCN25_A: 39.3,38.175 39.3,36.725 38.45,35.875 38.45,26.475 41.375,26.475 41.9,27 41.9,31.475 40.4,32.975 40.4,38.175
  region net NetCN25_K: 36.7,38.2 36.7,33.675 34.725,31.7 34.725,27.175 35.4,26.5 38.225,26.5 38.225,36.3 37.8,36.725 37.8,38.2
  pour cut-out: 34.75,105.075 34.75,98.075 53.75,98.075 53.75,105.075
  region net 12V: 119.65,33.825 119.65,33.325 121.8,33.325 121.8,33.825
  region: 76.675,38.825
  region: 76.65,41.65
  region: 63.725,35.475

## Silkscreen, mask and mechanical layers (free items; w line width, h text height)
Top Overlay:
  lines w0.254: 29.561,72.797 32.361,72.797 32.361,80.597 29.561,80.597 ; 29.821,72.797 27.021,72.797 27.021,72.997 27.021,80.597 29.821,80.597 ; 87.94,93.245 87.94,96.045 88.14,96.045 95.74,96.045 95.74,93.245 ; 87.94,93.505 87.94,90.705 95.74,90.705 95.74,93.505
  text "I2C" at 104.45,97.125 h1.14
  text "CLK" at 87.875,96.425 h0.81
  text "DIO" at 90.775,96.4 h0.81
  text "SWO" at 93.35,96.4 h0.81
  text "S" at 123.65,95.25 h1.27
  text "+" at 123.6,92.65 h1.27
  text "-" at 123.6,90.2 h1.27
  text "nRST" at 90.2,89.525 h0.81
  text "GND" at 93.575,89.5 h0.81
  text "JLCJLCJLCJLC" at 36.4,85.25 h1.25
  text "Robot Controller R1 / Isaac Wong / May 2020" at 94.575,82.525 h1.14
  text "Servo" at 25.375,81.15 h1.52
  text "S" at 25.425,78.55 h1.52
  text "+" at 25.425,76 h1.52
  text "-" at 25.45,73.45 h1.52
Bottom Overlay:
  text "CAN Bus" at 100.925,96.425 h1.52
Bottom Solder:
  rectangle: 35.95,38.4 43.725,42.375
  rectangle: 53.775,38.525 61.575,42.525
  rectangle: 91.85,38.25 99.65,42.25
  rectangle: 110.375,38.45 118.175,42.475
  region: 109.2,33.6
Mechanical 1:
  the board outline again, w0.1

## Text inside footprints (layer, text, board x,y; h text height)
U5: Top Overlay "1" at 61.41,53.525 h0.81 r180